# Altium PCB PCB1.pcbdoc
Units mm, origin at the board's own origin, x right, y up, seen from the top; angles counter-clockwise.
Board outline 58 x 30.6 mm, 2 copper layers (Top Layer, Bottom Layer); 8 components, 32 nets, 136 pads, 0 vias.
Unrouted connection lines stored in the file: 98.
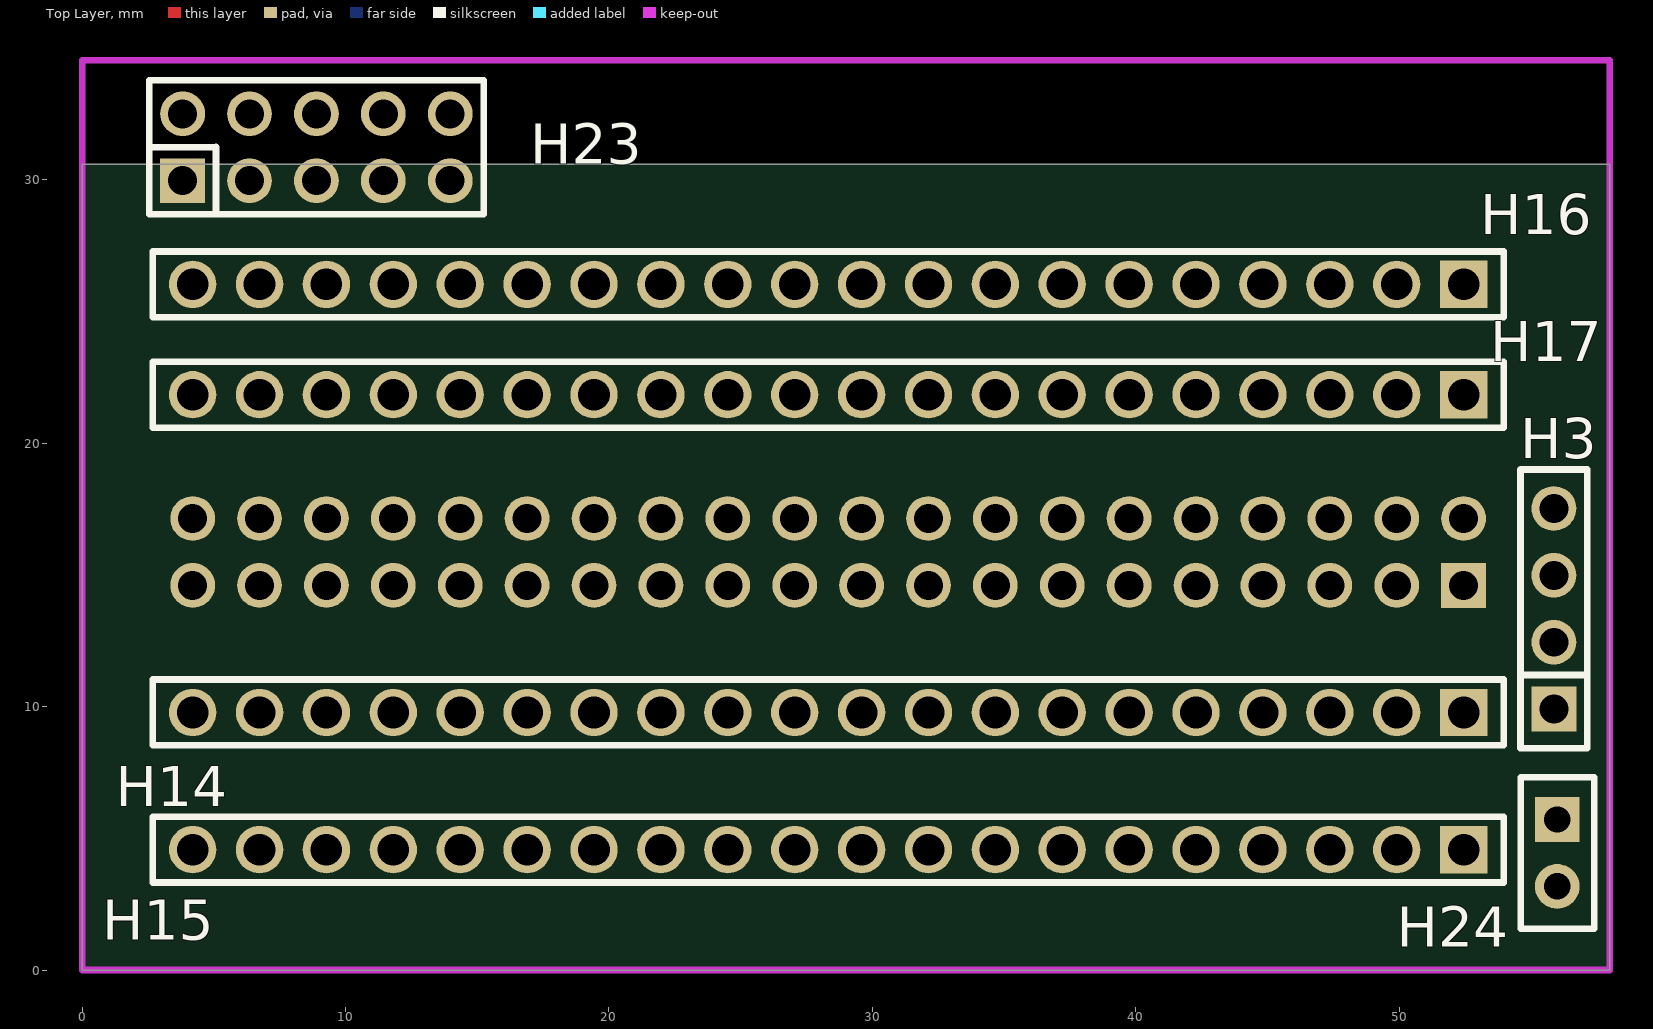
[diagram p0: Top Layer view]
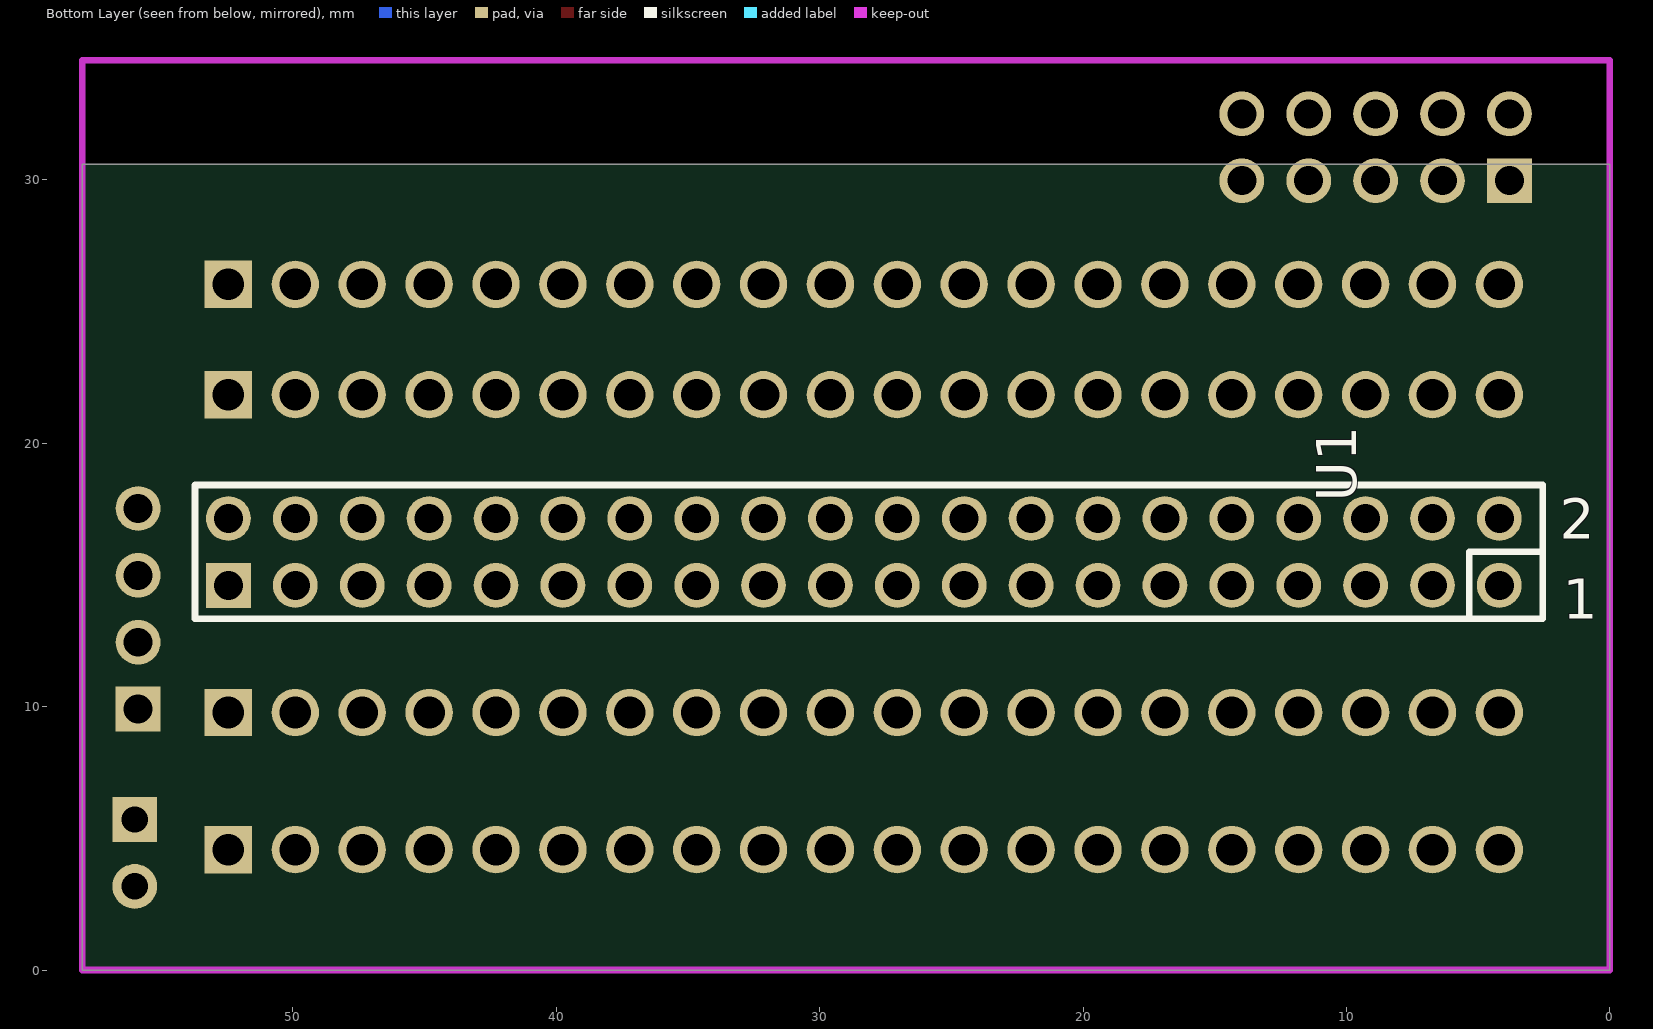
[diagram p1: Bottom Layer view, seen from below]

## Layer stack, top to bottom
Top Solder Mask Layer: solder mask 0.0102, Solder Resist, Dk 3.5
Top Layer: signal copper 0.0356
Dielectric1: dielectric 0.32, FR-4, Dk 4.8
Bottom Layer: signal copper 0.0356
Bottom Solder Mask Layer: solder mask 0.0102, Solder Resist, Dk 3.5

## Board outline
0,0 0,30.6 58,30.6 58,0

## Design rules (kind name [scope] priority, off if disabled: settings)
BoardOutlineClearance copperThickness1oz_1 [All] p1: gap=0.254 ignorepadtopadclearanceinfootprint=FALSE except(0: Arc-SplitContinuation Track-SplitContinuation SMDPad-SplitContinuation THPad-SplitContinuation Via-SplitContinuation Fill-SplitContinuation Poly-SplitContinuation Region-SplitContinuation Text-SplitContinuation; 0.152: Track-CutoutEdge SMDPad-CutoutEdge THPad-CutoutEdge Via-CutoutEdge Region-CutoutEdge; 0.3: Track-OutlineEdge SMDPad-OutlineEdge THPad-OutlineEdge Via-OutlineEdge Fill-OutlineEdge Fill-CutoutEdge Poly-OutlineEdge Region-OutlineEdge Text-OutlineEdge)
BoardOutlineClearance copperThickness2oz_1 [All] p2: gap=0.254 ignorepadtopadclearanceinfootprint=FALSE except(0: Arc-SplitContinuation Track-SplitContinuation SMDPad-SplitContinuation THPad-SplitContinuation Via-SplitContinuation Fill-SplitContinuation Poly-SplitContinuation Region-SplitContinuation Text-SplitContinuation; 0.152: Track-CutoutEdge SMDPad-CutoutEdge THPad-CutoutEdge Via-CutoutEdge Region-CutoutEdge; 0.3: Track-OutlineEdge SMDPad-OutlineEdge THPad-OutlineEdge Via-OutlineEdge Fill-OutlineEdge Fill-CutoutEdge Poly-OutlineEdge Region-OutlineEdge Text-OutlineEdge)
Clearance copperThickness1oz [(InNet('5V') OR InNet('GND') OR InNet('3.3V') OR InNet('GPIO2') OR InNet('GPIO3') OR InNet('GPIO4') OR InNet('GPIO05') OR InNet('GPIO26') OR InNet('GPIO19') OR InNet('GPIO13') OR InNet('GPIO06') OR InNet('GPIO0') OR InNet('GPIO11') OR InNet('GPIO09') OR InNet('GPIO10') OR InNet('3V3') OR InNet('GPIO22') OR InNet('GPIO27') OR InNet('GPIO17') OR InNet('GPIO21') OR InNet('GPIO20') OR InNet('GPIO16') OR InNet('GPIO12') OR InNet('GPIO1') OR InNet('GPIO07') OR InNet('GPIO8') OR InNet('GPIO25') OR InNet('GPIO24') OR InNet('GPIO23') OR InNet('GPIO18') OR InNet('GPIO15') OR InNet('GPIO14') OR InNet('VCC5V') OR InNet('$1N6172'))] p1: gap=0.152 ignorepadtopadclearanceinfootprint=FALSE except(0.102: Track-Track; 0.175: Track-Hole SMDPad-Hole THPad-Hole Via-Hole Fill-Hole Poly-Hole Region-Hole Text-Hole; 0.178: Arc-Arc Arc-Track Arc-SMDPad Arc-THPad Arc-Via Arc-Fill Arc-Poly Arc-Region Arc-Text Arc-Hole; 0.3: Track-Fill Fill-Region)
Clearance copperThickness2oz [All] p2: gap=0.152 ignorepadtopadclearanceinfootprint=FALSE except(0.175: Track-Hole SMDPad-Hole THPad-Hole Via-Hole Fill-Hole Poly-Hole Region-Hole Text-Hole; 0.178: Arc-Arc Arc-Track Arc-SMDPad Arc-THPad Arc-Via Arc-Fill Arc-Poly Arc-Region Arc-Text Arc-Hole; 0.203: Track-Track; 0.3: Track-Fill Fill-Region)
DiffPairsRouting differentialPair [All] p1: maxlimit=0.152 minlimit=0.152 mostfreqgap=0.152 toplayer_minwidth=0.127 toplayer_maxwidth=2.54 toplayer_prefwidth=0.254 bottomlayer_minwidth=0.127 bottomlayer_maxwidth=2.54 bottomlayer_prefwidth=0.254 maxuncoupledlength=0.254
PasteMaskExpansion pasteMaskExpansion [All] p1: expansion=0
PlaneConnect innerPlane [All] p1: planeconnectstyle=Relief reliefexpansion=0.508 reliefentries=4 reliefconductorwidth=0.254 reliefairgap=0.254
PolygonConnect copperRegion [All] p1: connectstyle=Relief reliefconductorwidth=0.254 reliefentries=4 polygonreliefangle="90 Angle" airgapwidth=0.254
RoutingVias viaSize [All] p1: holewidth=0.305 width=0.61 viastyle="Through Hole" minholewidth=0.3 minwidth=0.5 maxholewidth=6.3 maxwidth=10
SolderMaskExpansion solderMaskExpansion [All] p1: expansion=0.051 useseparateexpansions=TRUE expansionbottom=0.051
Width copperThickness1oz_2 [All] p1: maxlimit=2.54 minlimit=0.127 preferedwidth=0.254
Width copperThickness2oz_2 [All] p2: maxlimit=2.54 minlimit=0.203 preferedwidth=0.254
27 further rules are at their usual default settings.

## Components (designator, comment, footprint, x,y, rotation, side; value= is the part's Value field where it differs from the comment)
H3 "OLED" HDR-TH_4P-P2.54-V-F 55.88,13.716 r90 top
H14 "" HDR-TH_20P-P2.54-V-F 28.321,9.779 r180 top
H15 "" HDR-TH_20P-P2.54-V-F 28.321,4.572 r180 top
H16 "" HDR-TH_20P-P2.54-V-F 28.321,26.035 r180 top
H17 "" HDR-TH_20P-P2.54-V-F 28.321,21.844 r180 top
H23 "5V power outlet module" HDR-TH_10P-P2.54-V-M-R2-C5-S2.54 8.89,31.242 r0 top
H24 "external power supply" HDR-TH_2P-P2.54-V-F 56.007,4.445 r270 top
U1 "2.54*2*20pin 双排母" HDR-20X2-2.54 28.321,15.875 r180 bottom

## Footprints (in the part's own frame and the unit in brackets; to place one, negate y for a bottom-side part, rotate by r counter-clockwise, add the part's x,y. Pads: shape width x height; smd on the part's side, far side on the other; paste and mask are expansions set on the pad)
HDR-20X2-2.54 [mm]
  round 1.7 hole 1.1: 1(24.13,-1.27) 2(24.13,1.27) 3(21.59,-1.27) 4(21.59,1.27) 5(19.05,-1.27) 6(19.05,1.27) 7(16.51,-1.27) 8(16.51,1.27) 9(13.97,-1.27) 10(13.97,1.27) 11(11.43,-1.27) 12(11.43,1.27) 13(8.89,-1.27) 14(8.89,1.27) 15(6.35,-1.27) 16(6.35,1.27) 17(3.81,-1.27) 18(3.81,1.27) 19(1.27,-1.27) 20(1.27,1.27) 21(-1.27,-1.27) 22(-1.27,1.27) 23(-3.81,-1.27) 24(-3.81,1.27) 25(-6.35,-1.27) 26(-6.35,1.27) 27(-8.89,-1.27) 28(-8.89,1.27) 29(-11.43,-1.27) 30(-11.43,1.27) 31(-13.97,-1.27) 32(-13.97,1.27) 33(-16.51,-1.27) 34(-16.51,1.27) 35(-19.05,-1.27) 36(-19.05,1.27) 37(-21.59,-1.27) 38(-21.59,1.27) 40(-24.13,1.27)
  rect 1.7x1.7 hole 1.1: 39(-24.13,-1.27)
  silkscreen extent -25.4,-2.54 25.78,2.54
HDR-TH_2P-P2.54-V-F [mm]
  rect 1.7x1.7 hole 1: 1(-1.27,0)
  round 1.7 hole 1: 2(1.27,0)
  silkscreen extent -2.88,-1.39 2.88,1.4
HDR-TH_4P-P2.54-V-F [mm]
  rect 1.7x1.7 hole 1.1: 1(-3.81,0)
  round 1.7 hole 1.1: 2(-1.27,0) 3(1.27,0) 4(3.81,0)
  silkscreen extent -5.29,-1.27 5.29,1.27
HDR-TH_10P-P2.54-V-M-R2-C5-S2.54 [mm]
  rect 1.7x1.7 hole 1.1: 1(-5.08,-1.27)
  round 1.7 hole 1.1: 2(-5.08,1.27) 3(-2.54,-1.27) 4(-2.54,1.27) 5(0,-1.27) 6(0,1.27) 7(2.54,-1.27) 8(2.54,1.27) 9(5.08,-1.27) 10(5.08,1.27)
  silkscreen extent -6.35,-2.54 6.35,2.54
HDR-TH_20P-P2.54-V-F [mm]
  rect 1.8x1.8 hole 1.2: 1(-24.13,0)
  round 1.8 hole 1.2: 2(-21.59,0) 3(-19.05,0) 4(-16.51,0) 5(-13.97,0) 6(-11.43,0) 7(-8.89,0) 8(-6.35,0) 9(-3.81,0) 10(-1.27,0) 11(1.27,0) 12(3.81,0) 13(6.35,0) 14(8.89,0) 15(11.43,0) 16(13.97,0) 17(16.51,0) 18(19.05,0) 19(21.59,0) 20(24.13,0)
  silkscreen extent -25.65,-1.25 25.65,1.25

## Part data
H3: library part 2.54-1*4Pĸ
H14 H15 H16 H17: library part HDR-F_2.54_1x20P
H23: library part HDR-M_2.54_2x5
H24: library part HDR-F_2.54_1x2P
U1: library part "Rasperberry 5 GPIO"

## Nets (pads, with @x,y where several pads share a name; then routed paths per layer and width w, separated by ;. In a path a pad name is that pad's centre, name@x,y a point inside that pad or via, vN(x,y) a via of type N, cw(c..) or ccw(c..) an arc to the next point about the centre after c; other vN are vias at no path point)
3V3: H3.4 H14.12 H14.20 H15.12 H15.20 U1.1 U1.17
5V: H23.1 H23.3 H23.5 H23.7 H23.9
GND: H3.3 H14.1 H14.8 H14.16 H15.1 H15.8 H15.16 H16.4 H16.6 H16.11 H16.14 H16.18 H17.4 H17.6 H17.11 H17.14 H17.18 H23.2 H23.4 H23.6 H23.8 H23.10 H24.2 U1.6 U1.9 U1.14 U1.20 U1.25 U1.30 U1.34 U1.39
GPIO0: H14.7 H15.7 U1.27
GPIO1: H16.7 H17.7 U1.28
GPIO2: H3.1 H14.19 H15.19 U1.3
GPIO3: H3.2 H14.18 H15.18 U1.5
GPIO4: H14.17 H15.17 U1.7
GPIO05: H14.6 H15.6 U1.29
GPIO06: H14.5 H15.5 U1.31
GPIO07: H16.8 H17.8 U1.26
GPIO8: H16.9 H17.9 U1.24
GPIO09: H14.10 H15.10 U1.21
GPIO10: H14.11 H15.11 U1.19
GPIO11: H14.9 H15.9 U1.23
GPIO12: H16.5 H17.5 U1.32
GPIO13: H14.4 H15.4 U1.33
GPIO14: H16.17 H17.17 U1.8
GPIO15: H16.16 H17.16 U1.10
GPIO16: H16.3 H17.3 U1.36
GPIO17: H14.15 H15.15 U1.11
GPIO18: H16.15 H17.15 U1.12
GPIO19: H14.3 H15.3 U1.35
GPIO20: H16.2 H17.2 U1.38
GPIO21: H16.1 H17.1 U1.40
GPIO22: H14.13 H15.13 U1.15
GPIO23: H16.13 H17.13 U1.16
GPIO24: H16.12 H17.12 U1.18
GPIO25: H16.10 H17.10 U1.22
GPIO26: H14.2 H15.2 U1.37
GPIO27: H14.14 H15.14 U1.13
VCC5V: H24.1
pads on no net: H16.19 H16.20 H17.19 H17.20 U1.2 U1.4

## Keep-outs
Board Outline Layer:
  lines w0.254: 0,0 58,0 58,34.544 0,34.544 0,0

## Text inside footprints (layer, text, board x,y; h text height)
U1: Bottom Silkscreen Layer "1" at 1.778,13.335 h1.52; Bottom Silkscreen Layer "2" at 1.905,16.383 h1.52